# Altium PCB CAN Splitter.PcbDoc
Units mil, origin at the board's own origin, x right, y up, seen from the top; angles counter-clockwise.
Board outline 1115 x 575 mil, 2 copper layers (Top Layer, Bottom Layer); 3 components, 2 nets, 6 pads, 0 vias.
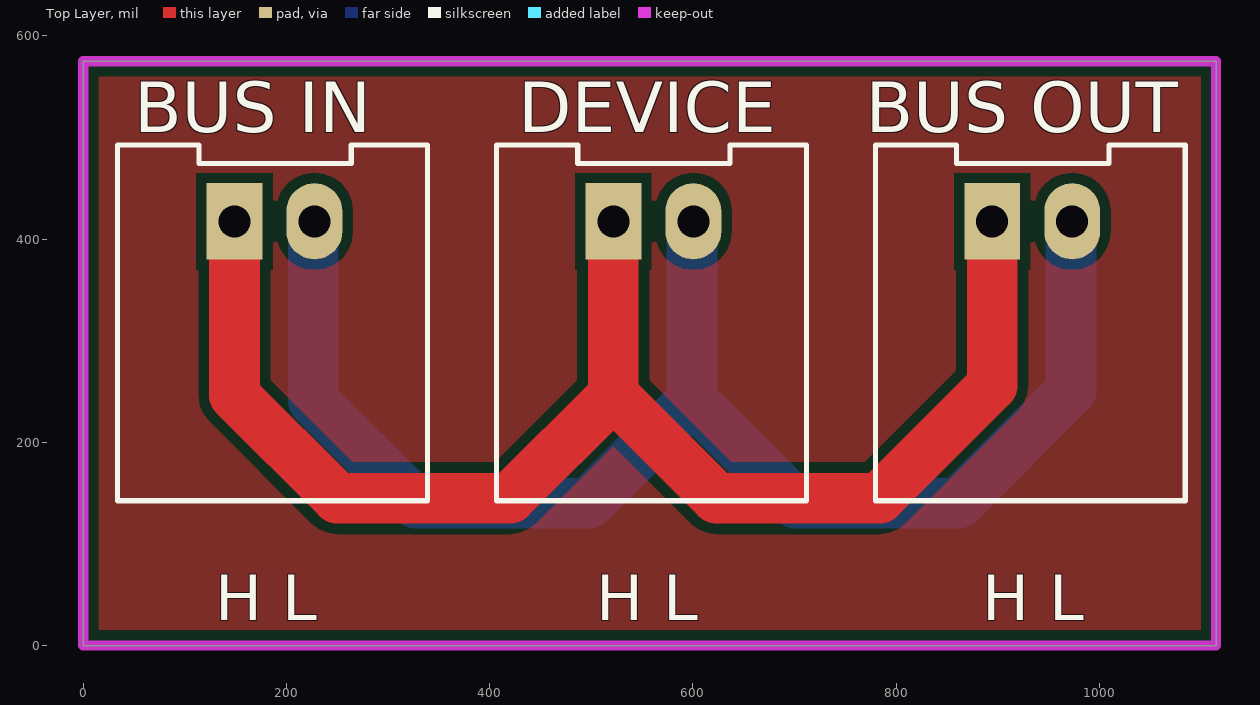
[diagram p0: Top Layer view]
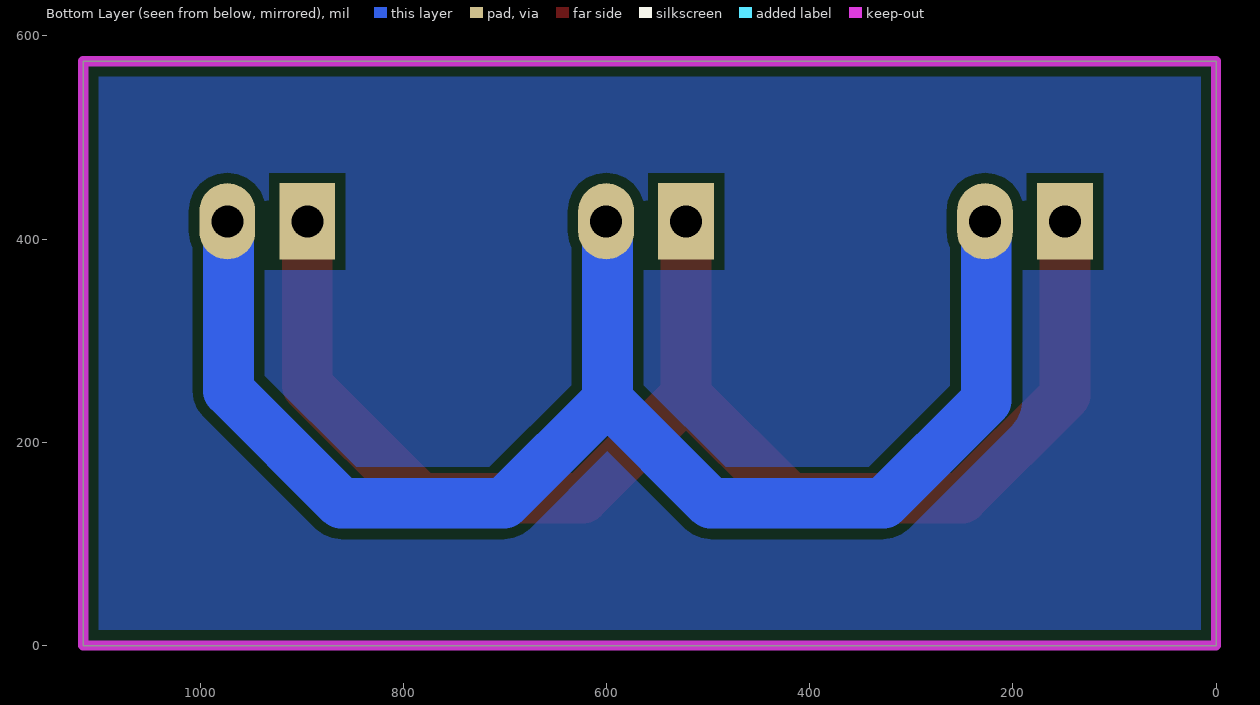
[diagram p1: Bottom Layer view, seen from below]
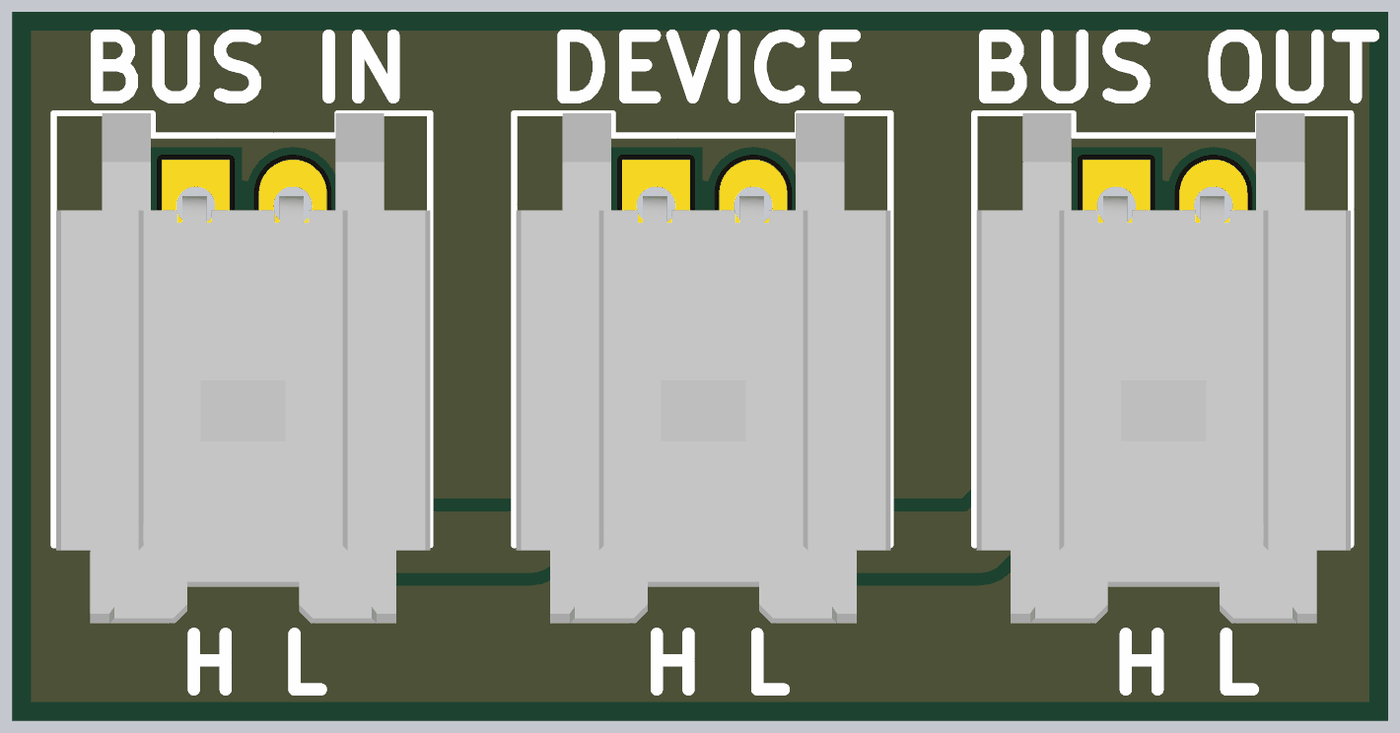
[diagram p2: 3D render of the assembled board from above, using the file's embedded part models]

## Layer stack, top to bottom
Top Solder: solder mask 0.4, Solder Resist, Dk 3.5
Top Layer: signal copper 1.4
Dielectric 1: dielectric 12.6, FR-4, Dk 4.8
Bottom Layer: signal copper 1.4
Bottom Solder: solder mask 0.4, Solder Resist, Dk 3.5

## Board outline
0,0 1115,0 1115,575 0,575

## Design rules (kind name [scope] priority, off if disabled: settings)
Clearance [All] p1: gap=10 ignorepadtopadclearanceinfootprint=FALSE except(0: Arc-Hole Track-Hole SMDPad-Hole THPad-Hole Via-Hole Fill-Hole Poly-Hole Region-Hole Text-Hole)
PolygonConnect [All] p1: connectstyle=Relief reliefconductorwidth=10 reliefentries=4 polygonreliefangle="90 Angle" airgapwidth=10
RoutingVias [All] p1: holewidth=28 width=50 viastyle="Through Hole" minholewidth=28 minwidth=50 maxholewidth=28 maxwidth=50
SolderMaskExpansion [All] p1: expansion=4
Width [All] p1: maxlimit=50 minlimit=10 preferedwidth=10
30 further rules are at their usual default settings.

## Components (designator, comment, footprint, x,y, rotation, side; value= is the part's Value field where it differs from the comment)
"BUS IN" "2-pin Horz Sherlock" MOLEX-HDR-1X2-SHERLOCK-HORZ 148.74,417.5 r180 top
"BUS OUT" "2-pin Horz Sherlock" MOLEX-HDR-1X2-SHERLOCK-HORZ 894.58,417.5 r180 top
DEVICE "2-pin Horz Sherlock" MOLEX-HDR-1X2-SHERLOCK-HORZ 521.66,417.5 r180 top

## Footprints (in the part's own frame and the unit in brackets; to place one, negate y for a bottom-side part, rotate by r counter-clockwise, add the part's x,y. Pads: shape width x height; smd on the part's side, far side on the other; paste and mask are expansions set on the pad)
MOLEX-HDR-1X2-SHERLOCK-HORZ [mm]
  rect 1.397x1.905 hole 0.8: 1(0,0)
  oval 1.397x1.905 hole 0.8: 2(-2,0)
  silkscreen extent -4.83,-1.91 2.92,6.98, body extent -4.83,-1.91 2.87,8.59, height 5.54

## Part data
"BUS IN" "BUS OUT" DEVICE: library part MOLEX-HDR-1x2-SHERLOCK_RA, "Header, Molex, 2mm Pitch Sherlock Header, Single Row, Horizontal, 2 Circuits, Length 3.3mm,  0353630260", Manufacturer="Molex Inc", Manufacturer Part Number=0353630260, Supplier Part Number 1=WM18931-ND, Supplier 1=Digi-Key

## Nets (pads, with @x,y where several pads share a name; then routed paths per layer and width w, separated by ;. In a path a pad name is that pad's centre, name@x,y a point inside that pad or via, vN(x,y) a via of type N, cw(c..) or ccw(c..) an arc to the next point about the centre after c; other vN are vias at no path point)
CANH: "BUS IN.1" "BUS OUT.1" DEVICE.1 | length 1421.7
  Top Layer w50: 148.74,417.5 148.74,246.26 250,145 420,145 521.66,246.66 ; DEVICE.1 521.66,246.66 ; 894.58,417.5 894.58,255.84 783.74,145 623.32,145 521.66,246.66
CANL: "BUS IN.2" "BUS OUT.2" DEVICE.2 | length 1436.7
  Bottom Layer w50: 226.22,417.5 226.22,241.26 327.48,140 497.48,140 599.14,241.66 ; DEVICE.2@599.14,417.5 599.14,241.66 ; 972.06,417.5 972.06,250.84 861.22,140 700.8,140 599.14,241.66

## Polygon pours and split planes (outlines as drawn)
no net on Top Layer "Top Layer-No Net" (solid, pour order 0): 0,575 1115,575 1115,0 0,0
no net on Bottom Layer "Bottom Layer-No Net" (solid, pour order 4): 0,575 1115,575 1115,0 0,0

## Keep-outs
Keep-Out Layer:
  the board outline again, w10

## Silkscreen, mask and mechanical layers (free items; w line width, h text height)
Top Overlay:
  text "H L" at 130,25 h45
  text "H L" at 505,25 h45
  text "H L" at 885,25 h45